# Altium PCB mach ghep.PcbDoc (part 1 of 2)
Units mm, origin at the board's own origin, x right, y up, seen from the top; angles counter-clockwise.
Board outline 152.4 x 101.6 mm, 2 copper layers (Top Layer, Bottom Layer); 174 components, 42 nets, 882 pads, 102 vias.
Unrouted connection lines stored in the file: 150.
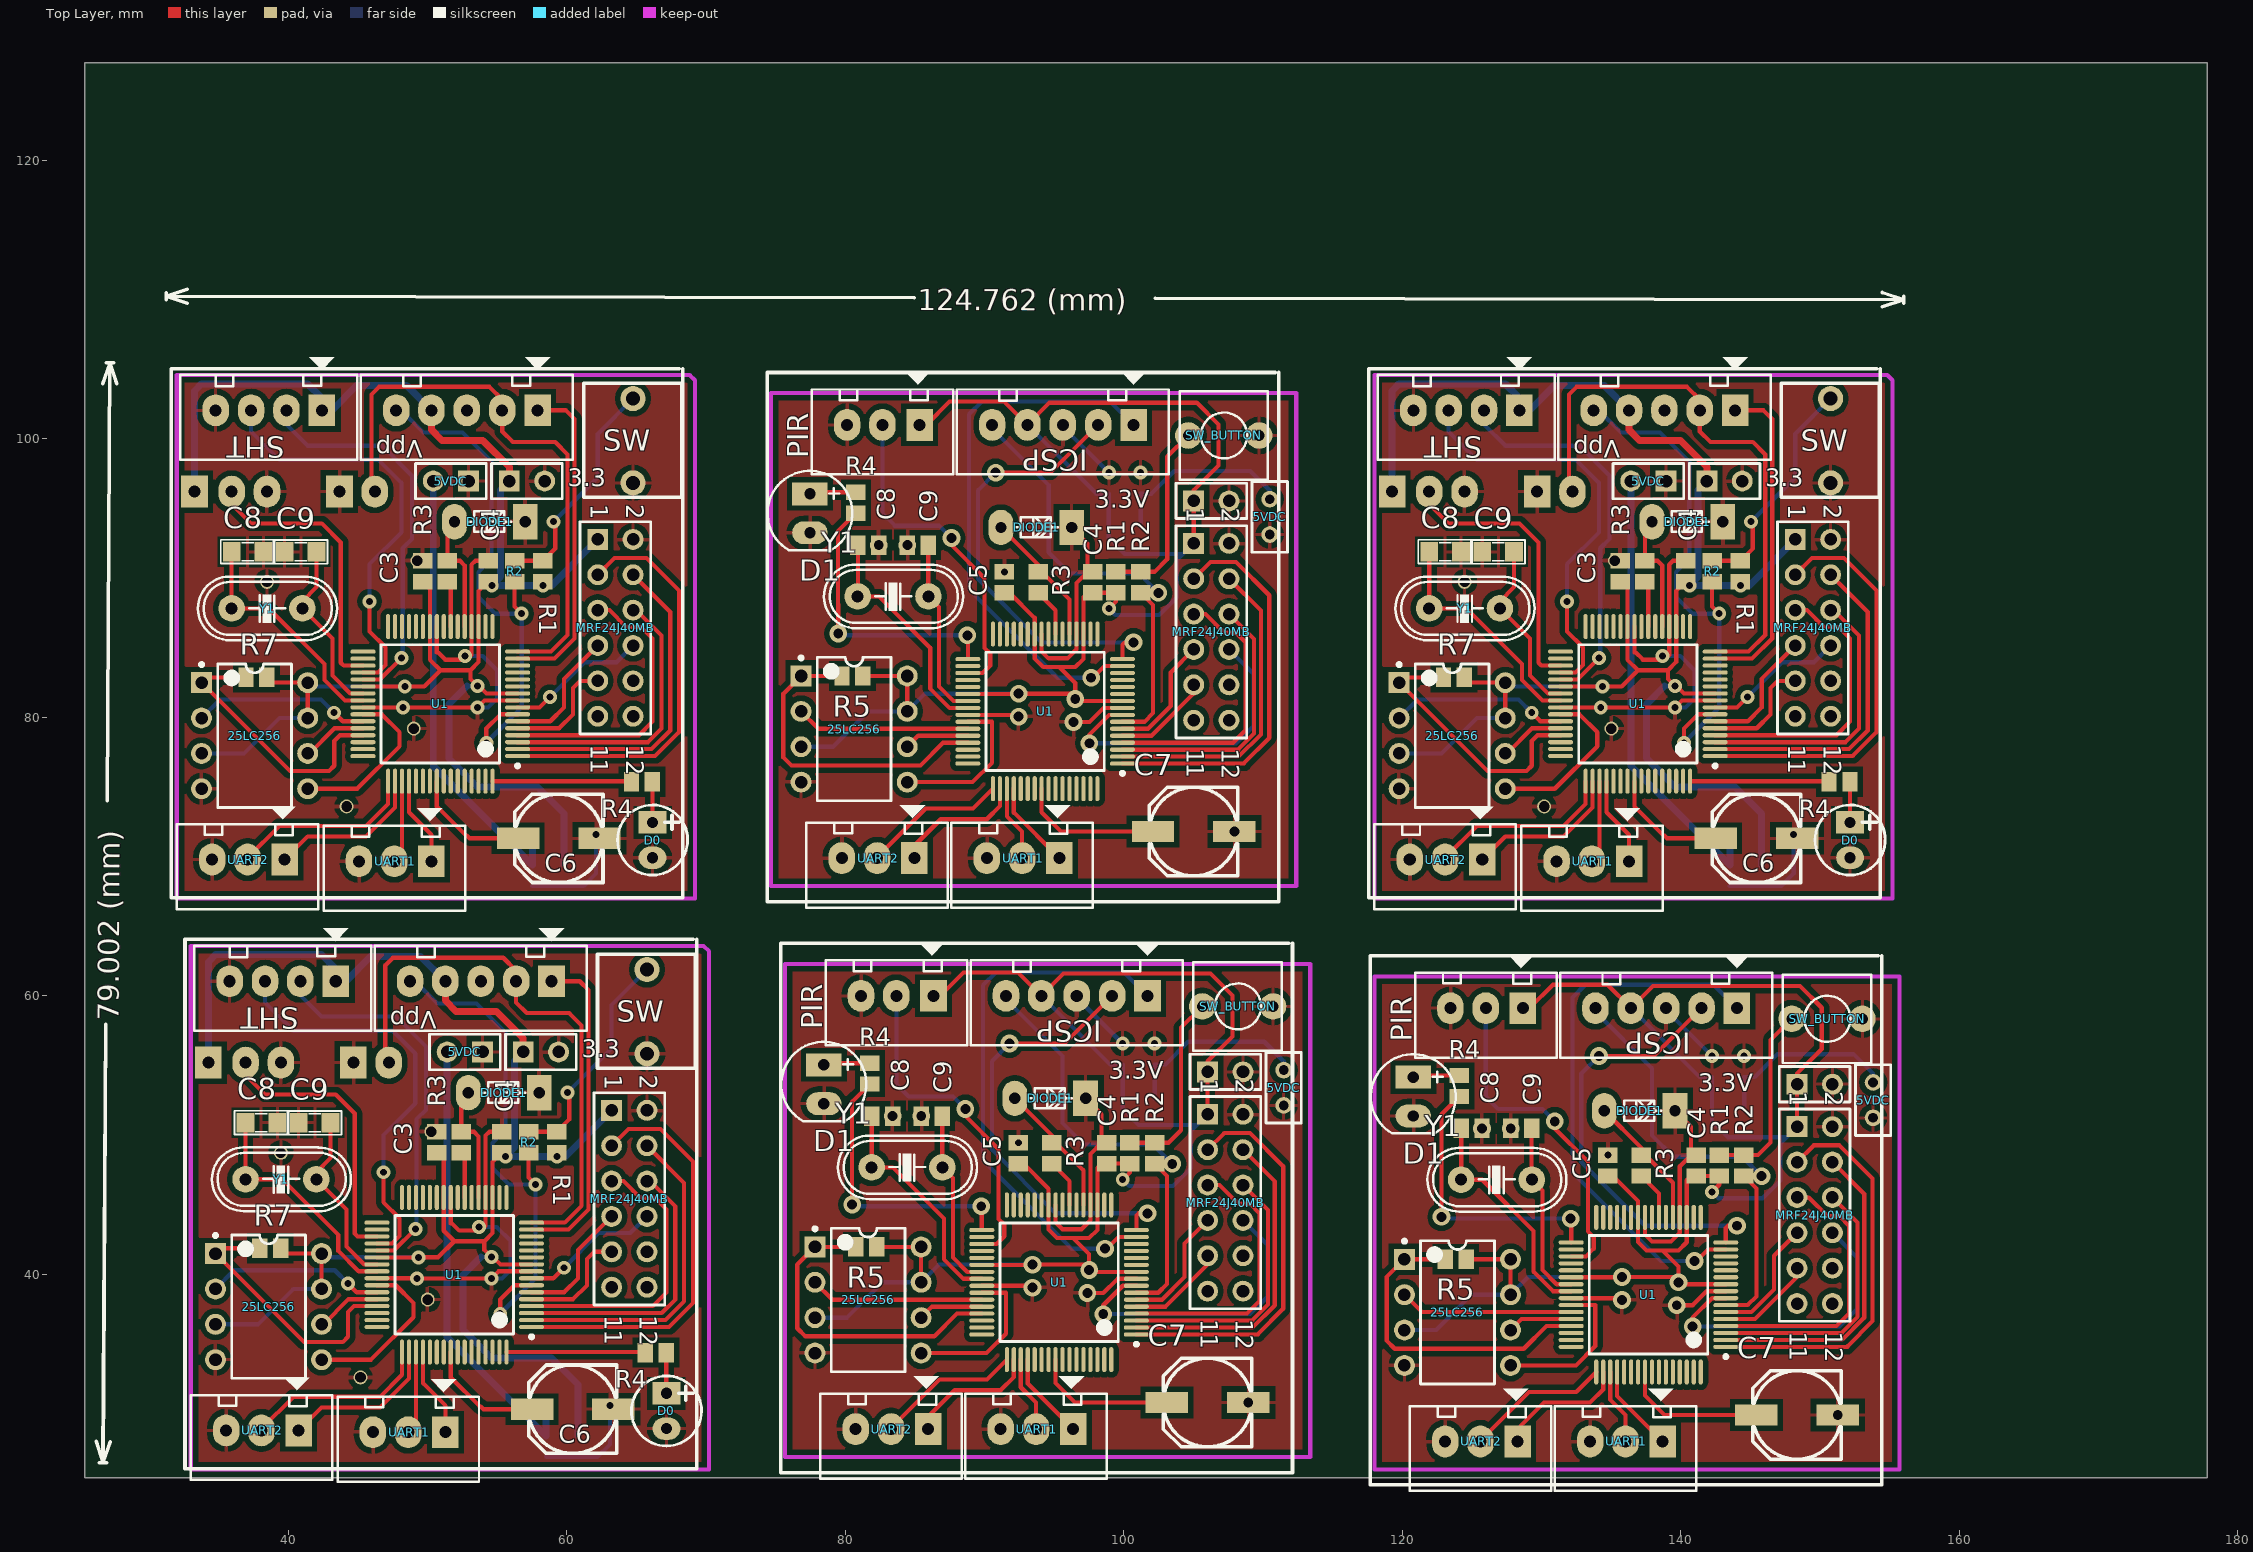
[diagram p0: Top Layer view]
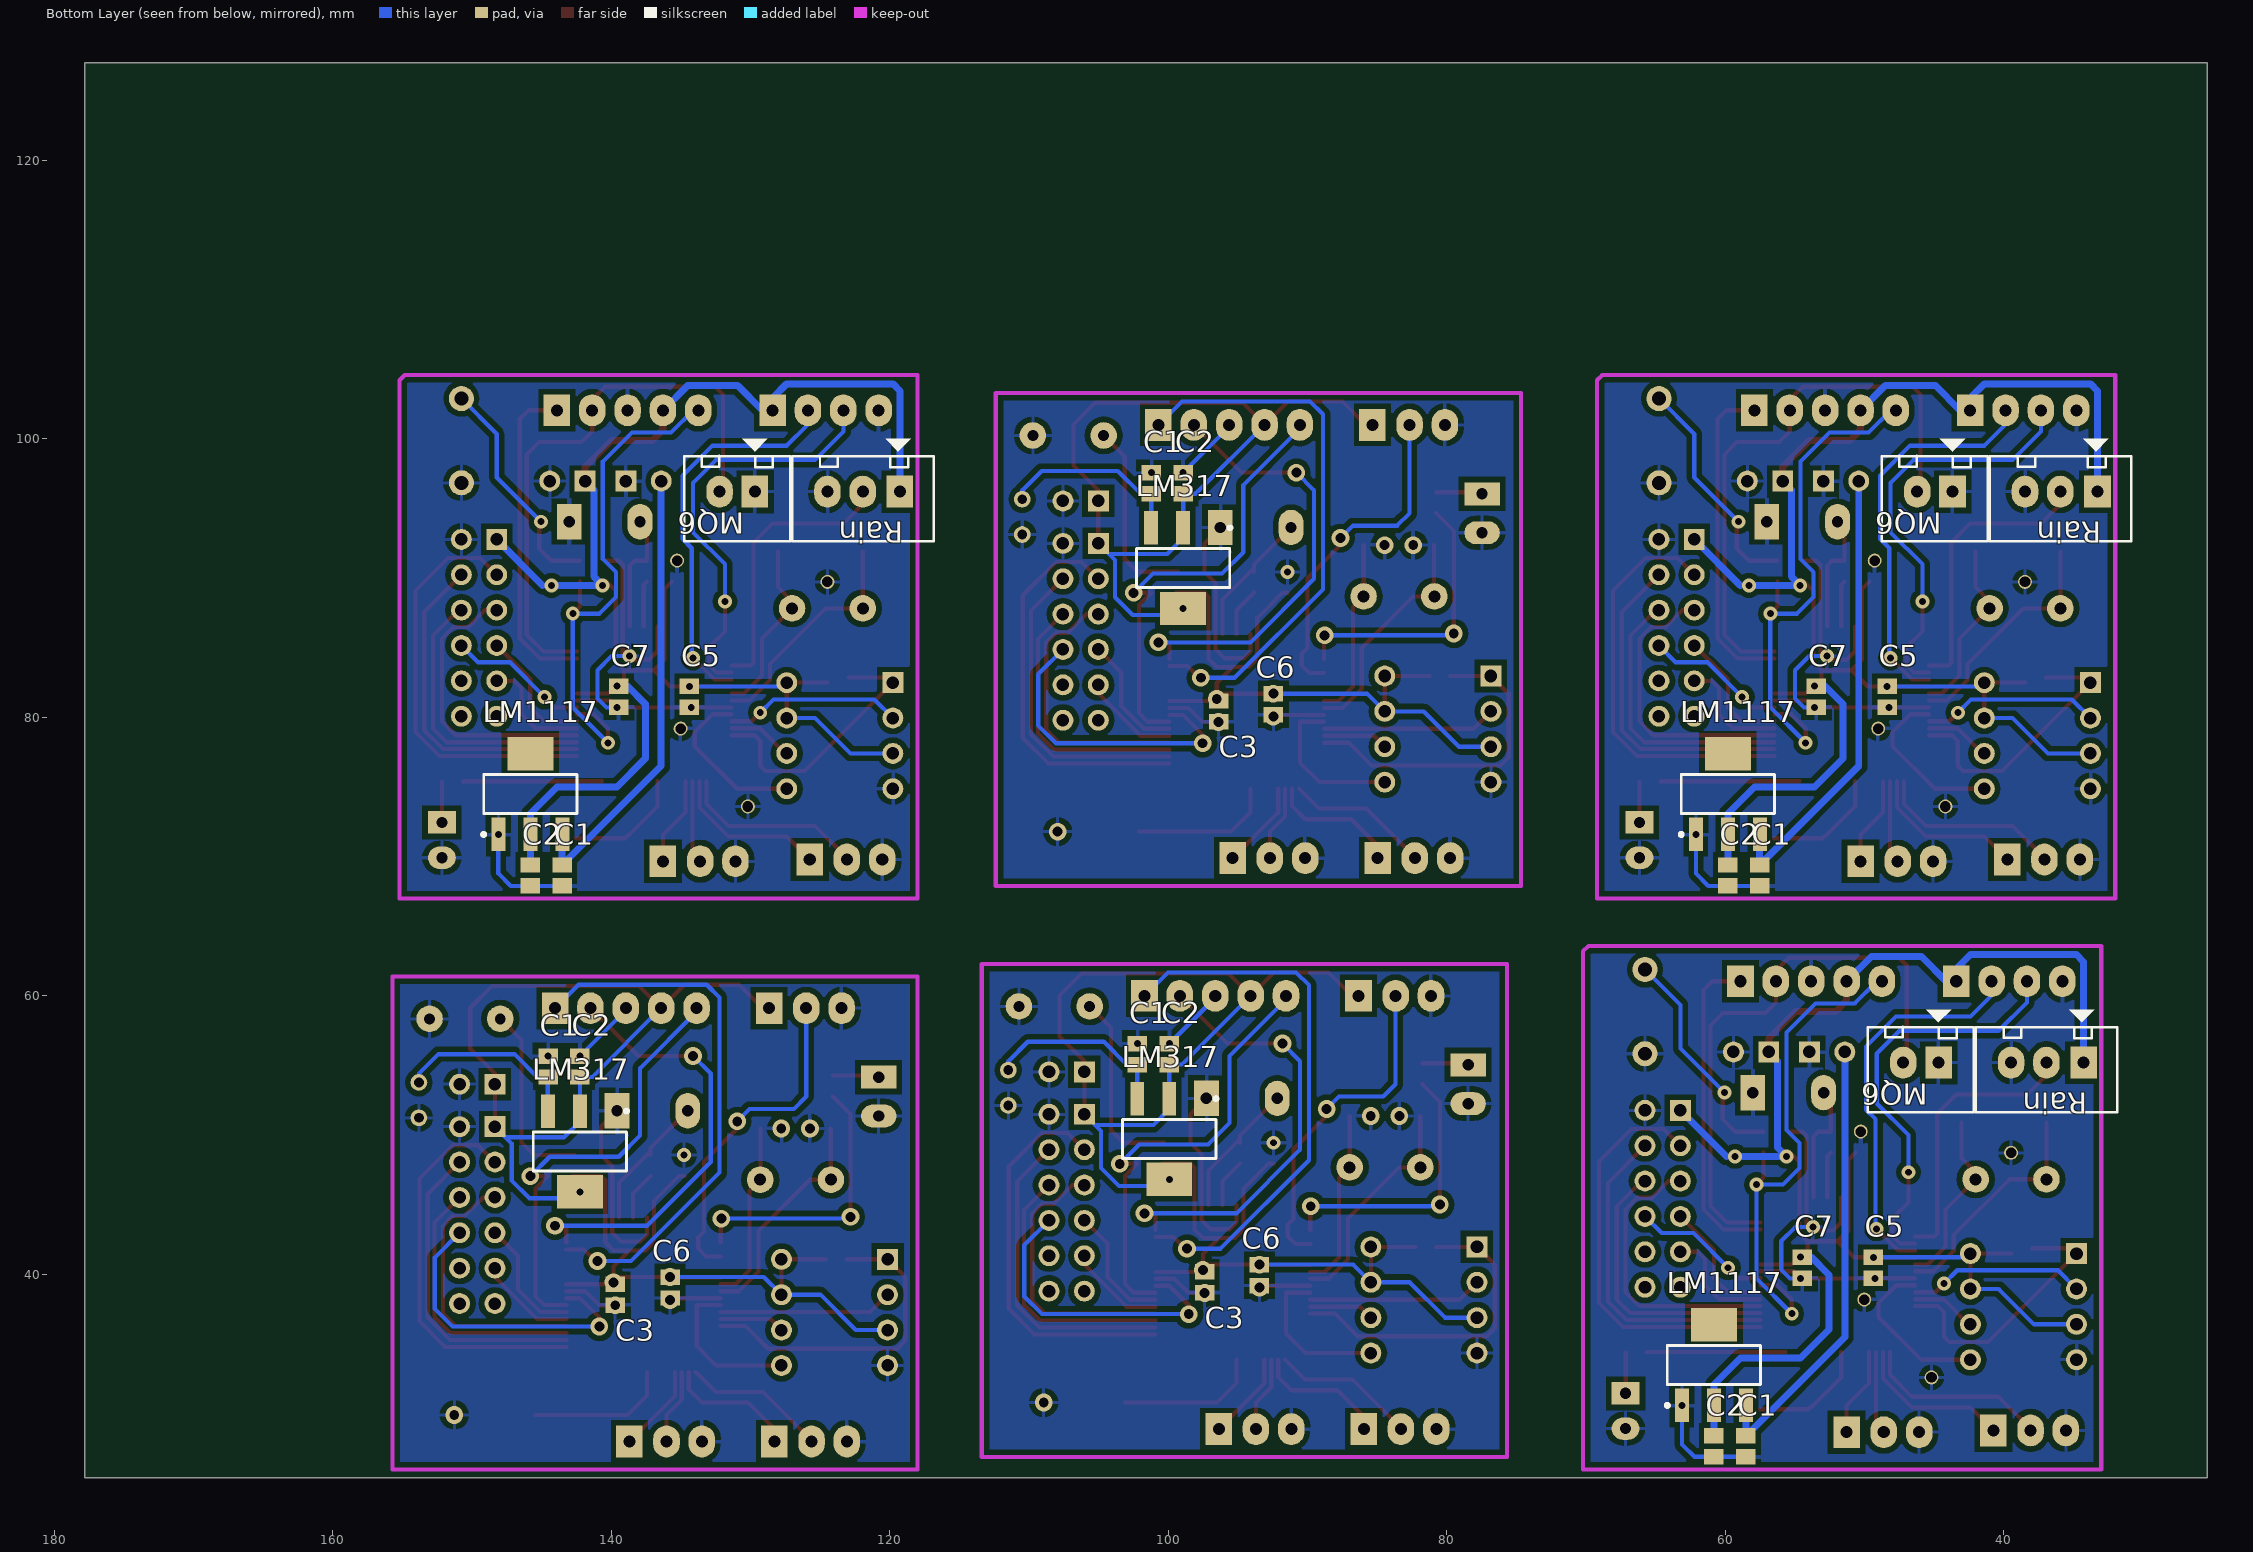
[diagram p1: Bottom Layer view, seen from below]

## Layer stack, top to bottom
Top Layer: signal copper 0.0356
Dielectric: dielectric 0.32, FR-4, Dk 4.8
Bottom Layer: signal copper 0.0356

## Board outline
25.4,25.4 177.8,25.4 177.8,127 25.4,127

## Design rules (kind name [scope] priority, off if disabled: settings)
Clearance [All] p1: gap=0.4
PolygonConnect [All] p1: connectstyle=Relief reliefconductorwidth=0.254 reliefentries=4 polygonreliefangle="90 Angle"
RoutingVias [All] p1: holewidth=0.711 width=1.27 viastyle="Through Hole" minholewidth=0.711 minwidth=1.27 maxholewidth=0.711 maxwidth=1.27
SilkscreenOverComponentPads [All] p1: minsilkscreentomaskgap=0.254
SolderMaskExpansion [All] p1: expansion=0.102
Width [All] p1: maxlimit=0.254 minlimit=0.254 preferedwidth=0.254
27 further rules are at their usual default settings.

## Components (designator, comment, footprint, x,y, rotation, side; value= is the part's Value field where it differs from the comment)
3.3 "Header 2" HDR1X2 55.876,96.972 r0 top (schematic designator 3.3VDC)
3.3 "Header 2" HDR1X2 56.876,55.972 r0 top (schematic designator 3.3VDC)
3.3 "Header 2" HDR1X2 141.876,96.972 r0 top (schematic designator 3.3VDC)
3.3V "OUT 3.3V" HDR1X2 105.025,95.545 r0 top
3.3V "OUT 3.3V" HDR1X2 106.025,54.545 r0 top
3.3V "OUT 3.3V" HDR1X2 148.353,53.656 r0 top
5VDC "Header 2" HDR1X2 52.955,96.972 r180 top
5VDC "Header 2" RAD-0.1 110.486,94.402 r90 top
5VDC "Header 2" HDR1X2 53.955,55.972 r180 top
5VDC "Header 2" RAD-0.1 111.486,53.402 r90 top
5VDC "Header 2" HDR1X2 138.955,96.972 r180 top
5VDC "Header 2" RAD-0.1 153.814,52.513 r90 top
25LC256 "25LC256" DIP-8 37.588,78.684 r0 top
25LC256 "25LC256" DIP-8 80.641,79.162 r0 top
25LC256 "25LC256" DIP-8 38.588,37.684 r0 top
25LC256 "25LC256" DIP-8 81.641,38.162 r0 top
25LC256 "25LC256" DIP-8 123.588,78.684 r0 top
25LC256 "25LC256" DIP-8 123.969,37.273 r0 top
C1 "Cap" C0805 57.527,68.651 r90 bottom
C1 "Cap" C0805 101.215,96.815 r270 bottom
C1 "Cap" C0805 58.527,27.651 r90 bottom
C1 "Cap" C0805 102.215,55.815 r270 bottom
C1 "Cap" C0805 143.527,68.651 r90 bottom
C1 "Cap" C0805 144.543,54.926 r270 bottom
C2 "Cap" C0805 59.813,68.651 r90 bottom
C2 "Cap" C0805 98.929,96.815 r270 bottom
C2 "Cap" C0805 60.813,27.651 r90 bottom
C2 "Cap" C0805 99.929,55.815 r270 bottom
C2 "Cap" C0805 145.813,68.651 r90 bottom
C2 "Cap" C0805 142.257,54.926 r270 bottom
C3 "Cap" C0805 49.653,90.495 r90 top
C3 "Cap" C0805 96.389,80.432 r270 bottom
C3 "Cap" C0805 50.653,49.495 r90 top
C3 "Cap" C0805 97.389,39.432 r270 bottom
C3 "Cap" C0805 135.653,90.495 r90 top
C3 "Cap" C0805 139.717,38.543 r270 bottom
C4 "Cap" C0805 54.352,90.495 r270 top
C4 "Cap" C0805 97.786,89.703 r90 top
C4 "Cap" C0805 55.352,49.495 r270 top
C4 "Cap" C0805 98.786,48.703 r90 top
C4 "Cap" C0805 140.352,90.495 r270 top
C4 "Cap" C0805 141.114,47.814 r90 top
C5 "Cap" C0805 48.383,81.478 r270 bottom
C5 "Cap" C0805 91.436,89.703 r270 top
C5 "Cap" C0805 49.383,40.478 r270 bottom
C5 "Cap" C0805 92.436,48.703 r270 top
C5 "Cap" C0805 134.383,81.478 r270 bottom
C5 "Cap" C0805 134.764,47.814 r270 top
C6 "Cap2" "CAP P 6.3x5.4" 59.432,71.318 r180 top
C6 "Cap" C0805 92.452,80.94 r270 bottom
C6 "Cap2" "CAP P 6.3x5.4" 60.432,30.318 r180 top
C6 "Cap" C0805 93.452,39.94 r270 bottom
C6 "Cap2" "CAP P 6.3x5.4" 145.432,71.318 r180 top
C6 "Cap" C0805 135.78,39.051 r270 bottom
C7 "Cap" C0805 53.463,81.478 r270 bottom
C7 "Cap2" "CAP P 6.3x5.4" 105.025,71.796 r180 top
C7 "Cap" C0805 54.463,40.478 r270 bottom
C7 "Cap2" "CAP P 6.3x5.4" 106.025,30.796 r180 top
C7 "Cap" C0805 139.463,81.478 r270 bottom
C7 "Cap2" "CAP P 6.3x5.4" 148.353,29.907 r180 top
C8 "Cap" SM-0805 37.08,91.892 r180 top
C8 "Cap" C0805 81.657,92.37 r180 top
C8 "Cap" SM-0805 38.08,50.892 r180 top
C8 "Cap" C0805 82.657,51.37 r180 top
C8 "Cap" SM-0805 123.08,91.892 r180 top
C8 "Cap" C0805 124.985,50.481 r180 top
C9 "Cap" SM-0805 40.89,91.892 r0 top
C9 "Cap" C0805 85.213,92.37 r0 top
C9 "Cap" SM-0805 41.89,50.892 r0 top
C9 "Cap" C0805 86.213,51.37 r0 top
C9 "Cap" SM-0805 126.89,91.892 r0 top
C9 "Cap" C0805 128.541,50.481 r0 top
D0 "LED nguon" LED3mm 66.163,71.191 r270 top
D0 "LED nguon" LED3mm 67.163,30.191 r270 top
D0 "LED nguon" LED3mm 152.163,71.191 r270 top
D1 "LED nguon" LED-5TRED 77.466,94.656 r270 top
D1 "LED nguon" LED-5TRED 78.466,53.656 r270 top
D1 "LED nguon" LED-5TRED 120.794,52.767 r270 top
DIODE1 "Diode" DZ0.5A 51.939,94.051 r180 top
DIODE1 "Diode" DZ0.5A 91.182,93.64 r180 top
DIODE1 "Diode" DZ0.5A 52.939,53.051 r180 top
DIODE1 "Diode" DZ0.5A 92.182,52.64 r180 top
DIODE1 "Diode" DZ0.5A 137.939,94.051 r180 top
DIODE1 "Diode" DZ0.5A 134.51,51.751 r180 top
ICSP "ICSP" CON5 100.707,101.006 r180 top
ICSP "ICSP" CON5 101.707,60.006 r180 top
ICSP "ICSP" CON5 144.035,59.117 r180 top
LM317 "LM317" SOT223-4N 98.929,90.719 r270 bottom
LM317 "LM317" SOT223-4N 99.929,49.719 r270 bottom
LM317 "LM317" SOT223-4N 142.257,48.83 r270 bottom
LM1117 "LM317" SOT223-4N 59.813,74.493 r90 bottom
LM1117 "LM317" SOT223-4N 60.813,33.493 r90 bottom
LM1117 "LM317" SOT223-4N 145.813,74.493 r90 bottom
MQ6 "MQ-6" CON2 43.684,96.21 r0 bottom
MQ6 "MQ-6" CON2 44.684,55.21 r0 bottom
MQ6 "MQ-6" CON2 129.684,96.21 r0 bottom
MRF24J40MB "Header 6X2" MRF24J40MB_board_mini 66.036,94.051 r180 top
MRF24J40MB "Header 6X2" MRF24J40MB_board_mini 108.835,93.767 r180 top
MRF24J40MB "Header 6X2" MRF24J40MB_board_mini 67.036,53.051 r180 top
MRF24J40MB "Header 6X2" MRF24J40MB_board_mini 109.835,52.767 r180 top
MRF24J40MB "Header 6X2" MRF24J40MB_board_mini 152.036,94.051 r180 top
MRF24J40MB "Header 6X2" MRF24J40MB_board_mini 152.163,51.878 r180 top
PIR "PIR module" CON3 85.213,101.006 r180 top (schematic designator PIR_CON)
PIR "PIR module" CON3 86.213,60.006 r180 top (schematic designator PIR_CON)
PIR "PIR module" CON3 128.541,59.117 r180 top (schematic designator PIR_CON)
R1 "Res1" C0805 58.289,90.495 r270 top
R1 "Res1" C0805 99.437,89.703 r270 top
R1 "Res1" C0805 59.289,49.495 r270 top
R1 "Res1" C0805 100.437,48.703 r270 top
R1 "Res1" C0805 144.289,90.495 r270 top
R1 "Res1" C0805 142.765,47.814 r270 top
R2 "res" C0805 56.257,90.495 r270 top
R2 "res" C0805 101.215,89.703 r270 top
R2 "res" C0805 57.257,49.495 r270 top
R2 "res" C0805 102.215,48.703 r270 top
R2 "res" C0805 142.257,90.495 r270 top
R2 "res" C0805 144.543,47.814 r270 top
R3 "Res1" C0805 51.431,90.495 r270 top
R3 "Res1" C0805 93.849,89.703 r270 top
R3 "Res1" C0805 52.431,49.495 r270 top
R3 "Res1" C0805 94.849,48.703 r270 top
R3 "Res1" C0805 137.431,90.495 r270 top
R3 "Res1" C0805 137.177,47.814 r270 top
R4 "Res1" C0805 65.401,75.382 r180 top
R4 "Res1" C0805 80.768,95.418 r270 top
R4 "Res1" C0805 66.401,34.382 r180 top
R4 "Res1" C0805 81.768,54.418 r270 top
R4 "Res1" C0805 151.401,75.382 r180 top
R4 "Res1" C0805 124.096,53.529 r270 top
R5 "Res Semi" C0805 80.514,82.972 r0 top
R5 "Res Semi" C0805 81.514,41.972 r0 top
R5 "Res Semi" C0805 123.842,41.083 r0 top
R7 "Res Semi" C0805 37.715,82.875 r0 top
R7 "Res Semi" C0805 38.715,41.875 r0 top
R7 "Res Semi" C0805 123.715,82.875 r0 top
Rain "PIR module" CON3 33.397,96.21 r0 bottom (schematic designator RainSensor)
Rain "PIR module" CON3 34.397,55.21 r0 bottom (schematic designator RainSensor)
Rain "PIR module" CON3 119.397,96.21 r0 bottom (schematic designator RainSensor)
SHT "SHT10 conector" CON4 42.414,102.052 r180 top (schematic designator SHT_CON)
SHT "SHT10 conector" CON4 43.414,61.052 r180 top (schematic designator SHT_CON)
SHT "SHT10 conector" CON4 128.414,102.052 r180 top (schematic designator SHT_CON)
SW "SW" SW-2P-S 62.226,96.845 r90 top (schematic designator SW_BUTTON)
SW "SW" SW-2P-S 63.226,55.845 r90 top (schematic designator SW_BUTTON)
SW "SW" SW-2P-S 148.226,96.845 r90 top (schematic designator SW_BUTTON)
SW_BUTTON "SW" SW2 109.724,100.244 r180 top
SW_BUTTON "SW" SW2 110.724,59.244 r180 top
SW_BUTTON "SW" SW2 153.052,58.355 r180 top
U1 "PIC24FJ128GA306" TQFP-PT64_N 50.923,80.97 r180 top
U1 "PIC24FJ128GA306" TQFP-PT64_N 94.357,80.432 r180 top
U1 "PIC24FJ128GA306" TQFP-PT64_N 51.923,39.97 r180 top
U1 "PIC24FJ128GA306" TQFP-PT64_N 95.357,39.432 r180 top
U1 "PIC24FJ128GA306" TQFP-PT64_N 136.923,80.97 r180 top
U1 "PIC24FJ128GA306" TQFP-PT64_N 137.685,38.543 r180 top
UART1 "UART1" CON3 50.161,69.667 r180 top
UART1 "Header 3" CON3 95.246,69.891 r180 top
UART1 "UART1" CON3 51.161,28.667 r180 top
UART1 "Header 3" CON3 96.246,28.891 r180 top
UART1 "UART1" CON3 136.161,69.667 r180 top
UART1 "Header 3" CON3 138.574,28.002 r180 top
UART2 "UART2" CON3 39.62,69.794 r180 top
UART2 "Header 3" CON3 84.832,69.891 r180 top
UART2 "UART2" CON3 40.62,28.794 r180 top
UART2 "Header 3" CON3 85.832,28.891 r180 top
UART2 "UART2" CON3 125.62,69.794 r180 top
UART2 "Header 3" CON3 128.16,28.002 r180 top
Vpp "ICSP" CON5 57.908,102.052 r180 top (schematic designator ICSP)
Vpp "ICSP" CON5 58.908,61.052 r180 top (schematic designator ICSP)
Vpp "ICSP" CON5 143.908,102.052 r180 top (schematic designator ICSP)
Y1 "XTAL" XT2 38.477,87.828 r180 top
Y1 "XTAL" XT2 83.435,88.687 r180 top
Y1 "XTAL" XT2 39.477,46.828 r180 top
Y1 "XTAL" XT2 84.435,47.687 r180 top
Y1 "XTAL" XT2 124.477,87.828 r180 top
Y1 "XTAL" XT2 126.763,46.798 r180 top

## Footprints (in the part's own frame and the unit in brackets; to place one, negate y for a bottom-side part, rotate by r counter-clockwise, add the part's x,y. Pads: shape width x height; smd on the part's side, far side on the other; paste and mask are expansions set on the pad)
C0805 [mm] "Chip Capacitor, Body 2.0x1.3mm, IPC High Density"
  rect 1.1x1.4 smd: 1(-0.75,0) 2(0.75,0)
  body extent -1.1,-0.72 1.1,0.72, height 1.4
"CAP P 6.3x5.4" [mil]
  rect 120x60 smd: 1(115,0) 2(-115,0)
  silkscreen extent -125,-125 125,125, body extent -138,-130 138,130, height 213
CON2 [mil] "CON2"
  rect 75x90 hole 34: 1(0,0)
  oval 75x90 hole 34: 2(100,0)
  silkscreen extent -100,-150 200,140, body extent -68,-70 168,107, height 236
CON3 [mil] "CON 3"
  rect 75x90 hole 34: 1(-5,0)
  oval 75x90 hole 34: 2(100,0) 3(200,0)
  silkscreen extent -100,-150 300,140, body extent -95,-90 295,136, height 276
CON4 [mil] "CON4"
  rect 75x90 hole 34: 1(0,0)
  oval 75x90 hole 34: 2(100,0) 3(200,0) 4(300,0)
  silkscreen extent -100,-149 400,140, body extent -90,-90 398,136, height 276
CON5 [mil] "CON5"
  rect 75x90 hole 34: 1(0,0)
  oval 75x90 hole 34: 2(100,0) 3(200,0) 4(300,0) 5(400,0)
  silkscreen extent -100,-150 500,140
DIP-8 [mm] "DIP; 8 Leads; Row Spacing 7.62 mm; Pitch 2.54 mm"
  rect 1.5x1.5 hole 0.9: 1(-3.81,3.81)
  round 1.5 hole 0.9: 2(-3.81,1.27) 3(-3.81,-1.27) 4(-3.81,-3.81) 5(3.81,-3.81) 6(3.81,-1.27) 7(3.81,1.27) 8(3.81,3.81)
  silkscreen extent -3.93,-5.15 2.65,5.23, body extent -3.6,-5.15 3.6,5.15, height 5.08
DZ0.5A [mil] "Diode Zenner, W 80mil, L 300mil"
  oval 70x100 hole 32: 1(0,0)
  rect 70x100 hole 32: 2(-200,0)
  silkscreen extent -161,-29 -42,28
HDR1X2 [mm] "Connector; Header; 2 Position"
  rect 1.5x1.5 hole 0.9: 1(0,0)
  round 1.5 hole 0.9: 2(2.54,0)
  silkscreen extent -1.27,-1.27 3.81,1.27
LED3mm [mm]
  rect 1.6x2 hole 0.8: 1(-1.27,0)
  oval 1.6x2 hole 0.8: 2(1.27,0)
  silkscreen extent -2.52,-2.51 2.51,2.52, body extent -1.99,-1.5 1.99,1.99, height 5.38
LED-5TRED [mil] "LED 2 PIN, 5 ly , Only colour, pin to pin 110mil"
  rect 65x100 hole 32: 1(-55,0)
  oval 65x100 hole 32: 2(55,0)
  silkscreen extent -120,-120 104,120, body extent -116,-117 98,120, height 339
MRF24J40MB_board_mini [mm]
  rect 1.5x1.5 hole 0.9: 1(3.81,1.27)
  round 1.5 hole 0.9: 2(1.27,1.27) 3(3.81,3.81) 4(1.27,3.81) 5(3.81,6.35) 6(1.27,6.35) 7(3.81,8.89) 8(1.27,8.89) 9(3.81,11.43) 10(1.27,11.43) 11(3.81,13.97) 12(1.27,13.97)
  silkscreen extent -2.29,-11 34.45,27, body extent 0,0 5.08,15.24, height 7
RAD-0.1 [mm] "Radial Cap, Thru-Hole; 2 Leads; 0.1 in Pin Spacing"
  round 1.2 hole 0.7: 1(-1.27,0) 2(1.27,0)
  silkscreen extent -2.54,-1.27 2.54,1.27
SM-0805 [mil] "Compoment SMD 80x50mil"
  rect 50x55 smd: 1(-45,0) 2(45,0)
  silkscreen extent -77,-34 76,33, body extent -40,-27 40,23, height 24
SOT223-4N [mm] "SOT223, 4-Leads, Body 6.5x3.5mm, Pitch 2.3mm, Lead Span 7mm, IPC Medium Density"
  rect 2.4x1 smd: 1(-2.9,2.3) 2(-2.9,0) 3(-2.9,-2.3)
  rect 2.4x3.3 smd: 4(2.9,0)
  silkscreen extent -3.02,-3.35 1.4,3.47, body extent -3.39,-3.27 3.5,3.23, height 1.72
SW2 [mil] "SW button 2pin, 250x 250 mil"
  round 75 hole 31: 1(0,0) 2(200,0)
  silkscreen extent -25,-125 225,125
SW-2P-S [mm]
  round 1.8 hole 1: 1(0,-2.54) 2(6.045,-2.54)
  silkscreen extent -1.04,-6.02 7.14,1.02
TQFP-PT64_N [mm] "Thin QFP, 64-Leads, Body 10x10mm, Pitch 0.5mm, IPC Medium Density"
  oval 1.8x0.3 smd: 1(-5.55,3.75) 2(-5.55,3.25) 3(-5.55,2.75) 4(-5.55,2.25) 5(-5.55,1.75) 6(-5.55,1.25) 7(-5.55,0.75) 8(-5.55,0.25) 9(-5.55,-0.25) 10(-5.55,-0.75) 11(-5.55,-1.25) 12(-5.55,-1.75) 13(-5.55,-2.25) 14(-5.55,-2.75) 15(-5.55,-3.25) 16(-5.55,-3.75) 33(5.55,-3.75) 34(5.55,-3.25) 35(5.55,-2.75) 36(5.55,-2.25) 37(5.55,-1.75) 38(5.55,-1.25) 39(5.55,-0.75) 40(5.55,-0.25) 41(5.55,0.25) 42(5.55,0.75) 43(5.55,1.25) 44(5.55,1.75) 45(5.55,2.25) 46(5.55,2.75) 47(5.55,3.25) 48(5.55,3.75)
  oval 0.3x1.8 smd: 17(-3.75,-5.55) 18(-3.25,-5.55) 19(-2.75,-5.55) 20(-2.25,-5.55) 21(-1.75,-5.55) 22(-1.25,-5.55) 23(-0.75,-5.55) 24(-0.25,-5.55) 25(0.25,-5.55) 26(0.75,-5.55) 27(1.25,-5.55) 28(1.75,-5.55) 29(2.25,-5.55) 30(2.75,-5.55) 31(3.25,-5.55) 32(3.75,-5.55) 49(3.75,5.55) 50(3.25,5.55) 51(2.75,5.55) 52(2.25,5.55) 53(1.75,5.55) 54(1.25,5.55) 55(0.75,5.55) 56(0.25,5.55) 57(-0.25,5.55) 58(-0.75,5.55) 59(-1.25,5.55) 60(-1.75,5.55) 61(-2.25,5.55) 62(-2.75,5.55) 63(-3.25,5.55) 64(-3.75,5.55)
  silkscreen extent -5.68,-4.25 4.25,4.57, body extent -5,-5 5,5, height 1.2
XT2 [mil] "Footpin for Crystal 2 pin"
  round 75 hole 34: 1(-100,0) 2(100,0)
  silkscreen extent -198,-90 195,90, body extent -233,-93 213,90, height 138

## Part data
3.3 3.3 3.3 5VDC 5VDC 5VDC 5VDC 5VDC 5VDC: "Header, 2-Pin"
3.3V 3.3V 3.3V MQ6 MQ6 MQ6: library part "Header 2", "Header, 2-Pin"
C1 C1 C1 C1 C1 C1 C2 C2 C2 C2 C2 C2 C3 C3 C3 C3 C3 C3 C4 C4 C4 C4 C4 C4 C5 C5 C5 C5 C5 C5 C6 C6 C6 C6 C6 C6 C7 C7 C7 C7 C7 C7 C8 C8 C8 C8 C8 C8 C9 C9 C9 C9 C9 C9: "Capacitor"
D0 D0 D0 D1 D1 D1: library part LED0, "Typical INFRARED GaAs LED"
DIODE1 DIODE1 DIODE1 DIODE1 DIODE1 DIODE1: "Default Diode"
ICSP ICSP ICSP Vpp Vpp Vpp: library part "Header 5", "Header, 5-Pin"
LM317 LM317 LM317 LM1117 LM1117 LM1117: "Adj Voltage +1.2 -> +37V"
MRF24J40MB MRF24J40MB MRF24J40MB MRF24J40MB MRF24J40MB MRF24J40MB: "Header, 6-Pin, Dual row"
PIR PIR PIR Rain Rain Rain: library part "Header 3H", "Header, 3-Pin, Right Angle"
R1 R1 R1 R1 R1 R1 R3 R3 R3 R3 R3 R3 R4 R4 R4 R4 R4 R4: "Resistor"
R2 R2 R2 R2 R2 R2: library part Res1, "Resistor"
R5 R5 R5 R7 R7 R7: "Semiconductor Resistor"
SHT SHT SHT: library part "Header 4", "Header, 4-Pin"
SW SW SW SW_BUTTON SW_BUTTON SW_BUTTON: library part SW2, "Switch button 2 pin"
UART1 UART1 UART1 UART2 UART2 UART2: library part Con3, "Connector 3"
UART1 UART1 UART1 UART2 UART2 UART2: "Header, 3-Pin"
Y1 Y1 Y1 Y1 Y1 Y1: "Crystal Oscillator"

## Free pads (board coordinates)
  round 1 hole 0.762: 0(38.477,89.733) 0(39.477,48.733) 0(44.192,73.604) 0(45.192,32.604) 0(49.018,79.192) 0(49.272,91.257) 0(50.018,38.192) 0(50.272,50.257) 0(124.477,89.733) 0(130.192,73.604) 0(135.018,79.192) 0(135.272,91.257)

## Via types
v1: diameter 1, hole 0.5, Top Layer to Bottom Layer, 57 vias
v2: diameter 1.27, hole 0.711, Top Layer to Bottom Layer, 45 vias

## Nets (pads, with @x,y where several pads share a name; then routed paths per layer and width w, separated by ;. In a path a pad name is that pad's centre, name@x,y a point inside that pad or via, vN(x,y) a via of type N, cw(c..) or ccw(c..) an arc to the next point about the centre after c; other vN are vias at no path point)
3.3VDC: 3.3.1 3.3V.1 25LC256.3 25LC256.7 25LC256.8 C2.2 C3.1 C4.1@97.786,88.953 C4.1@98.786,47.953 C4.1@141.114,47.064 C4.2@54.352,89.745 C4.2@55.352,48.745 C4.2@140.352,89.745 C5.1@48.383,82.228 C5.1@49.383,41.228 C5.1@134.383,82.228 C5.2@91.436,88.953 C5.2@92.436,47.953 C5.2@134.764,47.064 C6.1@92.452,81.69 C6.1@93.452,40.69 C6.1@135.78,39.801 C7.1@53.463,82.228 C7.1@54.463,41.228 C7.1@139.463,82.228 ICSP.4 LM317.2 LM1117.2 MRF24J40MB.1 PIR.1 R1.2 R5.2 R7.2 Rain.1 SHT.1 U1.10 U1.19 U1.26 U1.38 Vpp.4 | length 710.2
  Top Layer w0.3: R7.2@38.465,82.494 25LC256.8@41.398,82.494 25LC256.7@41.398,79.954 ; R7.2@39.465,41.494 25LC256.8@42.398,41.494 25LC256.7@42.398,38.954 ; U1.38@45.373,82.22 48.363,82.22 v1(48.371,82.228) 49.768,82.228 50.923,83.383 ; U1.38@46.373,41.22 49.363,41.22 v1(49.371,41.228) 50.768,41.228 51.923,42.383 ; C3.1@49.653,89.745 50.173,89.225 U1.26@50.173,86.52 50.173,84.133 50.923,83.383 ; C3.1@50.653,48.745 51.173,48.225 U1.26@51.173,45.52 51.173,43.133 51.923,42.383 ; v1(54.618,89.479) C4.2@54.352,89.745 53.673,89.066 U1.19@53.673,86.52 53.673,83.974 53.082,83.383 ; v1(55.618,48.479) C4.2@55.352,48.745 54.673,48.066 U1.19@54.673,45.52 54.673,42.974 54.082,42.383 ; U1.10@56.473,81.72 54.237,81.72 53.717,82.24 v1(53.59,82.24) 53.082,82.748 53.082,83.383 ; U1.10@57.473,40.72 55.237,40.72 54.717,41.24 v1(54.59,41.24) 54.082,41.748 54.082,42.383 ; R5.2@81.264,82.972 25LC256.8@84.451,82.972 25LC256.7@84.451,80.432 ; R5.2@82.264,41.972 25LC256.8@85.451,41.972 25LC256.7@85.451,39.432 ; PIR.1@85.34,101.006 85.816,101.006 87.499,102.689 91.404,102.689 ICSP.4@93.087,101.006 94.68,102.599 105.242,102.599 106.803,101.038 106.803,98.085 105.025,96.307 3.3V.1@105.025,95.545 MRF24J40MB.1@105.025,92.497 ; PIR.1@86.34,60.006 86.816,60.006 88.499,61.689 92.404,61.689 ICSP.4@94.087,60.006 95.68,61.599 106.242,61.599 107.803,60.038 107.803,57.085 106.025,55.307 3.3V.1@106.025,54.545 MRF24J40MB.1@106.025,51.497 ; U1.38@88.807,81.682 92.432,81.682 v2(92.452,81.702) 96.135,81.702 v2(96.516,81.321) ; U1.38@89.807,40.682 93.432,40.682 v2(93.452,40.702) 97.135,40.702 v2(97.516,40.321) ; C5.2@91.436,88.953 91.805,88.953 93.607,87.151 U1.26@93.607,85.982 93.607,84.219 94.219,83.607 95.368,83.607 ; C5.2@92.436,47.953 92.805,47.953 94.607,46.151 U1.26@94.607,44.982 94.607,43.219 95.219,42.607 96.368,42.607 ; v1(98.929,87.819) 99.437,88.327 R1.2@99.437,88.953 ; R1.2@99.31,88.953 C4.1@97.786,88.953 97.405,88.953 97.107,88.655 U1.19@97.107,85.982 97.107,84.198 96.516,83.607 95.368,83.607 ; U1.10@99.907,81.182 96.655,81.182 v2(96.516,81.321) ; v1(99.929,46.819) 100.437,47.327 R1.2@100.437,47.953 ; R1.2@100.31,47.953 C4.1@98.786,47.953 98.405,47.953 98.107,47.655 U1.19@98.107,44.982 98.107,43.198 97.516,42.607 96.368,42.607 ; U1.10@100.907,40.182 97.655,40.182 v2(97.516,40.321) ; R7.2@124.465,82.494 25LC256.8@127.398,82.494 25LC256.7@127.398,79.954 ; R5.2@124.592,41.083 25LC256.8@127.779,41.083 25LC256.7@127.779,38.543 ; PIR.1@128.668,59.117 129.144,59.117 130.827,60.8 134.732,60.8 ICSP.4@136.415,59.117 138.008,60.71 148.57,60.71 150.131,59.149 150.131,56.196 148.353,54.418 3.3V.1@148.353,53.656 MRF24J40MB.1@148.353,50.608 ; U1.38@131.373,82.22 134.363,82.22 v1(134.371,82.228) 135.768,82.228 136.923,83.383 ; U1.38@132.135,39.793 135.76,39.793 v2(135.78,39.813) 139.463,39.813 v2(139.844,39.432) ; C5.2@134.764,47.064 135.133,47.064 136.935,45.262 U1.26@136.935,44.093 136.935,42.33 137.547,41.718 138.696,41.718 ; C3.1@135.653,89.745 136.173,89.225 U1.26@136.173,86.52 136.173,84.133 136.923,83.383 ; v1(140.618,89.479) C4.2@140.352,89.745 139.673,89.066 U1.19@139.673,86.52 139.673,83.974 139.082,83.383 ; v1(142.257,45.93) 142.765,46.438 R1.2@142.765,47.064 ; U1.10@142.473,81.72 140.237,81.72 139.717,82.24 v1(139.59,82.24) 139.082,82.748 139.082,83.383 ; R1.2@142.638,47.064 C4.1@141.114,47.064 140.733,47.064 140.435,46.766 U1.19@140.435,44.093 140.435,42.309 139.844,41.718 138.696,41.718 ; U1.10@143.235,39.293 139.983,39.293 v2(139.844,39.432) ; 50.923,83.383 53.082,83.383 ; 51.923,42.383 54.082,42.383 ; 95.368,83.607 96.516,82.459 v2(96.516,81.321) ; 96.368,42.607 97.516,41.459 v2(97.516,40.321) ; 136.923,83.383 139.082,83.383 ; 138.696,41.718 139.844,40.57 v2(139.844,39.432)
  Top Layer w0.5: Vpp.4@50.288,102.052 50.288,100.655 51.05,99.893 53.971,99.893 55.876,97.988 3.3.1@55.876,96.972 ; Vpp.4@51.288,61.052 51.288,59.655 52.05,58.893 54.971,58.893 56.876,56.988 3.3.1@56.876,55.972 ; Vpp.4@136.288,102.052 136.288,100.655 137.05,99.893 139.971,99.893 141.876,97.988 3.3.1@141.876,96.972
  Bottom Layer w0.3: 25LC256.3@33.778,77.414 36.826,77.414 39.366,79.954 25LC256.7@41.398,79.954 ; 25LC256.3@34.778,36.414 37.826,36.414 40.366,38.954 25LC256.7@42.398,38.954 ; 25LC256.8@41.398,82.494 41.664,82.228 v1(48.371,82.228) C5.1@48.383,82.228 ; 25LC256.8@42.398,41.494 42.664,41.228 v1(49.371,41.228) C5.1@49.383,41.228 ; SHT.1@42.414,102.941 SHT.1@42.414,102.052 SHT.1@43.141,102.052 ; SHT.1@43.414,61.941 SHT.1@43.414,61.052 SHT.1@44.141,61.052 ; C7.1@52.828,82.24 v1(53.59,82.24) ; C7.1@53.828,41.24 v1(54.59,41.24) ; 3.3.1@55.241,96.337 3.3.1@55.876,96.972 ; 3.3.1@56.241,55.337 3.3.1@56.876,55.972 ; v1(58.289,89.479) 58.924,89.479 ; v1(59.289,48.479) 59.924,48.479 ; 25LC256.3@76.831,77.892 79.117,77.892 81.657,80.432 25LC256.7@84.451,80.432 85.721,81.702 v2(92.452,81.702) ; 25LC256.3@77.831,36.892 80.117,36.892 82.657,39.432 25LC256.7@85.451,39.432 86.721,40.702 v2(93.452,40.702) ; ICSP.4@93.087,101.006 98.028,96.065 C2.2@98.929,96.065 LM317.2@98.929,93.619 98.929,92.878 100.072,91.735 104.263,91.735 ; ICSP.4@94.087,60.006 99.028,55.065 C2.2@99.929,55.065 LM317.2@99.929,52.619 99.929,51.878 101.072,50.735 105.263,50.735 ; v1(98.929,87.819) 99.394,87.354 102.548,87.354 103.825,88.63 103.825,91.297 104.263,91.735 ; v1(99.929,46.819) 100.394,46.353 103.549,46.353 104.825,47.63 104.825,50.297 105.263,50.735 ; MRF24J40MB.1@105.025,92.497 104.263,91.735 ; MRF24J40MB.1@106.025,51.497 105.263,50.735 ; 25LC256.3@119.778,77.414 122.826,77.414 125.366,79.954 25LC256.7@127.398,79.954 ; 25LC256.3@120.159,36.003 122.445,36.003 124.985,38.543 25LC256.7@127.779,38.543 129.049,39.813 v2(135.78,39.813) ; 25LC256.8@127.398,82.494 127.664,82.228 v1(134.371,82.228) C5.1@134.383,82.228 ; SHT.1@128.414,102.941 SHT.1@128.414,102.052 SHT.1@129.141,102.052 ; ICSP.4@136.415,59.117 141.356,54.176 C2.2@142.257,54.176 LM317.2@142.257,51.73 142.257,50.989 143.4,49.846 147.591,49.846 ; C7.1@138.828,82.24 v1(139.59,82.24) ; 3.3.1@141.241,96.337 3.3.1@141.876,96.972 ; v1(142.257,45.93) 142.722,45.464 145.877,45.464 147.153,46.741 147.153,49.408 147.591,49.846 ; v1(144.289,89.479) 144.924,89.479 ; MRF24J40MB.1@148.353,50.608 147.591,49.846
  Bottom Layer w0.5: Rain.1@33.27,96.21 33.27,103.449 33.778,103.957 41.398,103.957 SHT.1@42.414,102.941 ; Rain.1@34.27,55.21 34.27,62.449 34.778,62.957 42.398,62.957 SHT.1@43.414,61.941 ; SHT.1@43.141,102.052 44.919,103.83 48.51,103.83 Vpp.4@50.288,102.052 ; SHT.1@44.141,61.052 45.919,62.83 49.51,62.83 Vpp.4@51.288,61.052 ; C7.1@52.828,82.24 51.558,80.97 51.558,77.033 53.59,75.001 57.908,75.001 59.813,73.096 LM1117.2@59.813,71.593 C2.2@59.813,69.401 ; C7.1@53.828,41.24 52.558,39.97 52.558,36.033 54.59,34.001 58.908,34.001 60.813,32.096 LM1117.2@60.813,30.593 C2.2@60.813,28.401 ; 3.3.1@55.241,96.337 55.241,90.102 v1(54.618,89.479) v1(58.289,89.479) ; 3.3.1@56.241,55.337 56.241,49.102 v1(55.618,48.479) v1(59.289,48.479) ; 58.924,89.479 MRF24J40MB.1@62.226,92.781 ; 59.924,48.479 MRF24J40MB.1@63.226,51.781 ; Rain.1@119.27,96.21 119.27,103.449 119.778,103.957 127.398,103.957 SHT.1@128.414,102.941 ; SHT.1@129.141,102.052 130.919,103.83 134.51,103.83 Vpp.4@136.288,102.052 ; C7.1@138.828,82.24 137.558,80.97 137.558,77.033 139.59,75.001 143.908,75.001 145.813,73.096 LM1117.2@145.813,71.593 C2.2@145.813,69.401 ; 3.3.1@141.241,96.337 141.241,90.102 v1(140.618,89.479) v1(144.289,89.479) ; 144.924,89.479 MRF24J40MB.1@148.226,92.781
5VDC: 5VDC.2@50.415,96.972 5VDC.2@51.415,55.972 5VDC.2@136.415,96.972 C1.2@57.527,69.401 C1.2@58.527,28.401 C1.2@143.527,69.401 LM1117.3 | length 98.1
  Bottom Layer w0.3: LM1117.3@57.513,71.593 LM1117.3@57.527,71.579 ; LM1117.3@58.513,30.593 LM1117.3@58.527,30.579 ; LM1117.3@143.513,71.593 LM1117.3@143.527,71.579
  Bottom Layer w0.5: 5VDC.2@50.415,96.972 50.415,76.513 C1.2@57.527,69.401 LM1117.3@57.527,71.579 ; 5VDC.2@51.415,55.972 51.415,35.513 C1.2@58.527,28.401 LM1117.3@58.527,30.579 ; 5VDC.2@136.415,96.972 136.415,76.513 C1.2@143.527,69.401 LM1117.3@143.527,71.579
AN8: DIODE1.1 R3.1 U1.21 | length 56.3
  Top Layer w0.3: DIODE1.1@51.939,94.051 51.431,93.543 R3.1@51.431,91.245 52.332,91.245 52.673,90.904 U1.21@52.673,86.52 ; DIODE1.1@52.939,53.051 52.431,52.543 R3.1@52.431,50.245 53.332,50.245 53.673,49.904 U1.21@53.673,45.52 ; DIODE1.1@91.182,93.64 93.849,90.973 R3.1@93.849,90.453 93.988,90.592 96.107,88.473 U1.21@96.107,85.982 ; DIODE1.1@92.182,52.64 94.849,49.973 R3.1@94.849,49.453 94.988,49.592 97.107,47.473 U1.21@97.107,44.982 ; DIODE1.1@134.51,51.751 137.177,49.084 R3.1@137.177,48.564 137.316,48.703 139.435,46.584 U1.21@139.435,44.093 ; DIODE1.1@137.939,94.051 137.431,93.543 R3.1@137.431,91.245 138.332,91.245 138.673,90.904 U1.21@138.673,86.52
CS: 
CS1: MRF24J40MB.6 U1.3 | length 118.5
  Top Layer w0.3: U1.3@56.473,78.22 65.826,78.22 66.798,79.192 66.798,85.883 64.98,87.701 MRF24J40MB.6@64.766,87.701 ; U1.3@57.473,37.22 66.826,37.22 67.798,38.192 67.798,44.883 65.98,46.701 MRF24J40MB.6@65.766,46.701 ; U1.3@99.907,77.682 108.244,77.682 108.244,77.722 109.365,78.843 109.365,85.623 107.571,87.417 MRF24J40MB.6@107.565,87.417 ; U1.3@100.907,36.682 109.244,36.682 109.244,36.722 110.365,37.843 110.365,44.623 108.571,46.417 MRF24J40MB.6@108.565,46.417 ; U1.3@142.473,78.22 151.826,78.22 152.798,79.192 152.798,85.883 150.98,87.701 MRF24J40MB.6@150.766,87.701 ; U1.3@143.235,35.793 151.572,35.793 151.572,35.833 152.693,36.954 152.693,43.734 150.899,45.528 MRF24J40MB.6@150.893,45.528
CS2: 25LC256.1 R5.1 U1.45 | length 119.4
  Top Layer w0.3: 25LC256.1@33.778,82.494 40.128,76.144 42.922,76.144 43.303,76.525 43.303,78.303 43.72,78.72 U1.45@45.373,78.72 ; 25LC256.1@34.778,41.494 41.128,35.144 43.922,35.144 44.303,35.525 44.303,37.303 44.72,37.72 U1.45@46.373,37.72 ; R5.1@79.764,82.972 25LC256.1@76.831,82.972 75.556,81.697 75.556,77.13 76.134,76.552 85.397,76.552 87.027,78.182 U1.45@88.807,78.182 ; R5.1@80.764,41.972 25LC256.1@77.831,41.972 76.556,40.697 76.556,36.13 77.134,35.552 86.397,35.552 88.027,37.182 U1.45@89.807,37.182 ; 25LC256.1@119.778,82.494 126.128,76.144 128.922,76.144 129.303,76.525 129.303,78.303 129.72,78.72 U1.45@131.373,78.72 ; R5.1@123.092,41.083 25LC256.1@120.159,41.083 118.884,39.808 118.884,35.241 119.462,34.663 128.725,34.663 130.355,36.293 U1.45@132.135,36.293